# Altium PCB Hugo3D.PcbDoc
Units mm, origin at the board's own origin, x right, y up, seen from the top; angles counter-clockwise.
Board outline 30 x 20 mm, 2 copper layers (Top Layer, Bottom Layer), stack 1.571 mm thick; 4 components, 3 nets, 14 pads, 0 vias.
Unrouted connection lines stored in the file: 2.
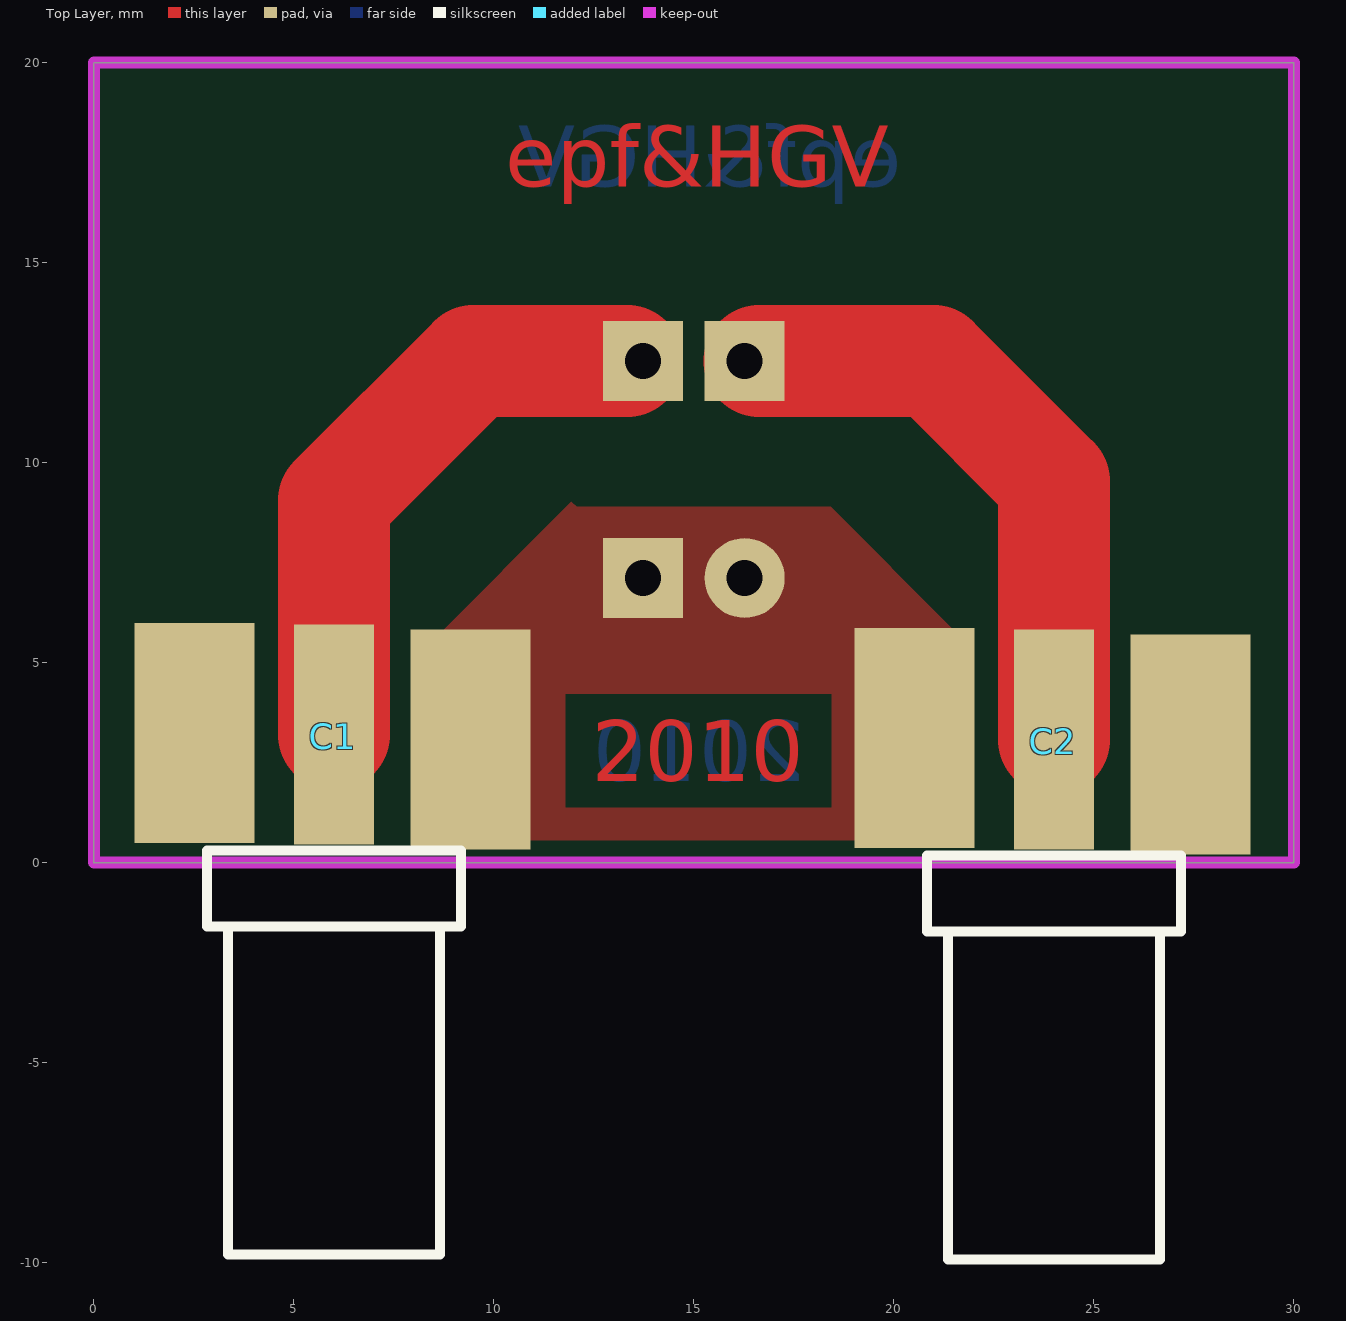
[diagram p0: Top Layer view]
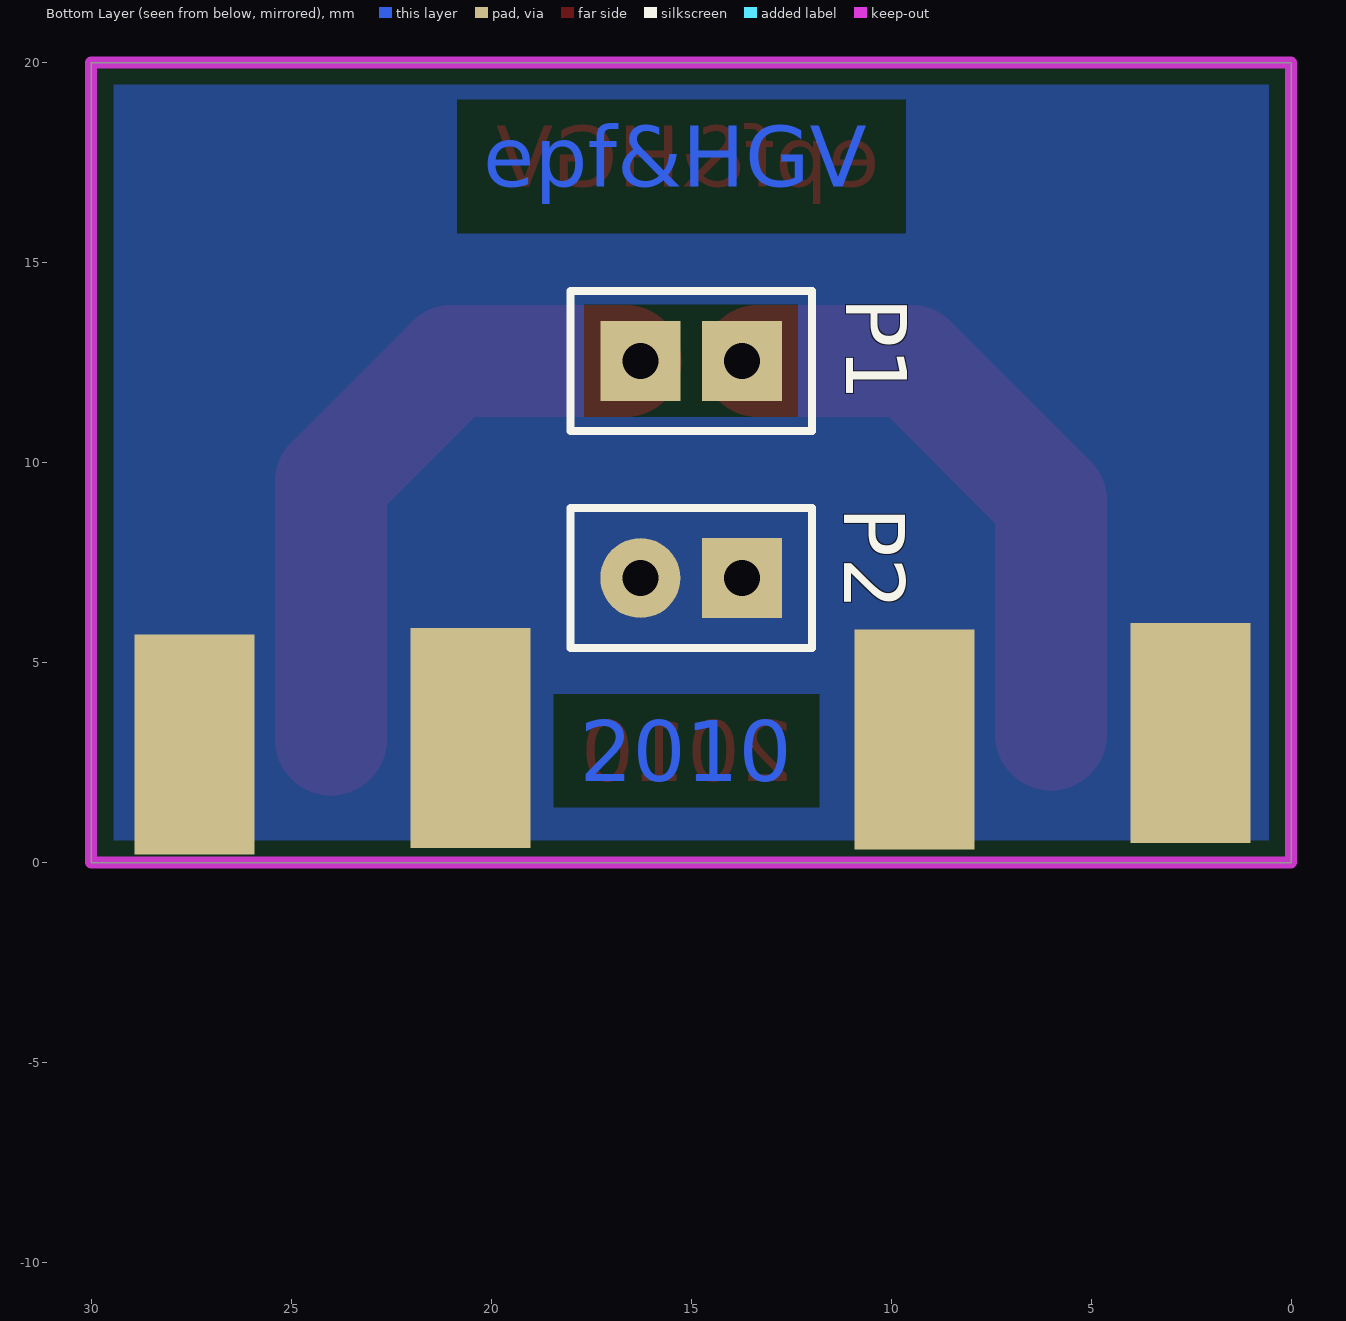
[diagram p1: Bottom Layer view, seen from below]

## Layer stack, top to bottom
Top Layer: signal copper 0.0356
Dielectric: core 1.5, FR-4, Dk 4.8
Bottom Layer: signal copper 0.0356

## Board outline
0,0 30,0 30,20 0,20

## Design rules (kind name [scope] priority, off if disabled: settings)
Clearance [All] p1: gap=0.4
PolygonConnect [All] p1: connectstyle=Direct reliefconductorwidth=0.254 reliefentries=4 polygonreliefangle="90 Angle"
RoomDefinition Hugo3D [InComponentClass('Hugo3D')] p1: confinementstyle=ConfineIn formatcopy=TRUE lockcomponents=FALSE outline 0.254,-11.303 30.099,-11.303 30.099,20 0.254,20
RoutingVias [All] p1: holewidth=0.6 width=2 viastyle="Through Hole" minholewidth=0.2 minwidth=1.27 maxholewidth=1 maxwidth=3
SilkscreenOverComponentPads [All] p1: minsilkscreentomaskgap=0
SolderMaskExpansion [All] p1: expansion=0.102
TestPointUsage [All] p1: valid=0 allowmultiple=FALSE
Testpoint [All] p1: side=15 testpointundercomponent=TRUE minsize=1.016 maxsize=2.54 preferedsize=1.524 minholesize=0 maxholesize=1.016 preferedholesize=0.813 testpointgrid=0.025 style=1023 order=0-112345678
Width [All] p1: maxlimit=3 minlimit=0.2 preferedwidth=2
23 further rules are at their usual default settings.

## Components (designator, comment, footprint, x,y, rotation, side; value= is the part's Value field where it differs from the comment)
C1 "SMA" SMA2-pequeño 6,0.454 r180 top
C2 "SMA" SMA2-pequeño 24,0.327 r180 top
P1 "Header 2" Header2_Vertical#1 16.27,12.54 r180 bottom
P2 "Header 2" Header2_Vertical#2 13.73,7.112 r0 bottom

## Footprints (in the part's own frame and the unit in brackets; to place one, negate y for a bottom-side part, rotate by r counter-clockwise, add the part's x,y. Pads: shape width x height; smd on the part's side, far side on the other; paste and mask are expansions set on the pad)
Header2_Vertical#1 [mm]
  rect 2x2 hole 0.9: 1(0,0) 2(2.54,0)
  silkscreen extent -1.75,-1.75 4.29,1.75, body extent -1.27,-1.25 3.81,1.25, height 8.5
Header2_Vertical#2 [mm]
  rect 2x2 hole 0.9: 1(0,0)
  round 2 hole 0.9: 2(2.54,0)
  silkscreen extent -1.75,-1.75 4.29,1.75, body extent -1.27,-1.25 3.81,1.25, height 8.5
SMA2-pequeño [mm]
  rect 2x5.5 smd: 1(0,-2.75)
  rect 3x5.5 smd: 2(-3.414,-2.626) 4(3.484,-2.791)
  rect 3x5.5 smd far side: 3(-3.414,-2.626) 5(3.484,-2.791)
  silkscreen extent -3.17,0.15 3.17,10.25, body extent -3.17,-5.38 3.18,9.78, height 3.56

## Part data
P1 P2: "Header, 2-Pin"

## Nets (pads, with @x,y where several pads share a name; then routed paths per layer and width w, separated by ;. In a path a pad name is that pad's centre, name@x,y a point inside that pad or via, vN(x,y) a via of type N, cw(c..) or ccw(c..) an arc to the next point about the centre after c; other vN are vias at no path point)
GND: C1.2 C1.3 C1.4 C1.5 C2.2 C2.3 C2.4 C2.5 P2.1 P2.2
NetC1_1: C1.1 P1.2 | length 14.6
  Top Layer w2.8: C1.1 6,9.048 9.492,12.54 P1.2@13.33,12.54
NetC2_1: C2.1 P1.1 | length 15.1
  Top Layer w2.8: P1.1@16.637,12.54 20.988,12.54 24,9.528 C2.1

## Polygon pours and split planes (outlines as drawn)
GND on Top Layer "GND" (solid, remove dead copper, pour order 1000): 8.509,0.381 8.509,5.588 11.938,9.017 12.065,8.89 18.034,8.89 18.415,8.89 21.463,5.842 21.463,0.381
GND on Bottom Layer "GND_bottom" (solid, remove dead copper, pour order 1001): 0,0 0,19.812 30,19.812 30,0

## Keep-outs
Keep-Out Layer:
  the board outline again, w0.3

## Other copper
Top Layer:
  text "epf&HGV" at 10.287,16.891 h1.52
  text "2010" at 12.446,2.032 h1.52
Bottom Layer:
  text "epf&HGV" at 20.193,16.891 h1.52
  text "2010" at 17.78,2.032 h1.52

## Silkscreen, mask and mechanical layers (free items; w line width, h text height)
Drill Drawing:
  text ".LEGEND" at 35.08,5.08 h1.52
  text "Drill Drawing." at 35.08,2.54 h1.52

## Dimensions
0,0 to 30,0 on Mechanical 1
0,0 to 0,20 on Mechanical 1